# Allegro board HY_RTL8152_V10_210602.brd
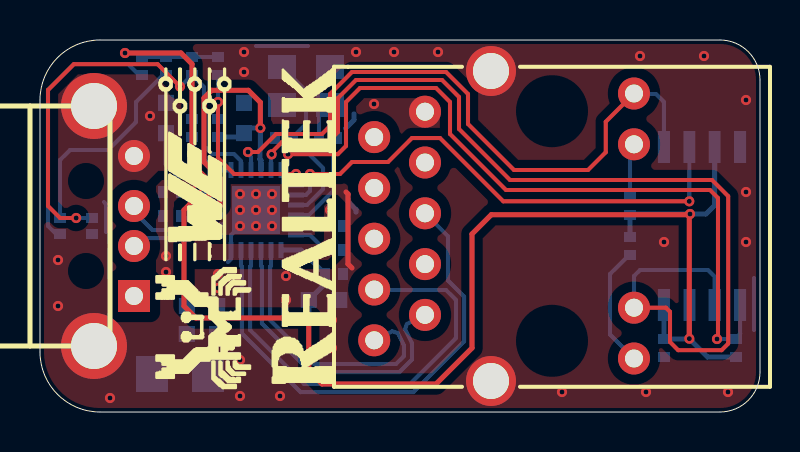
[diagram p0: board, top side]
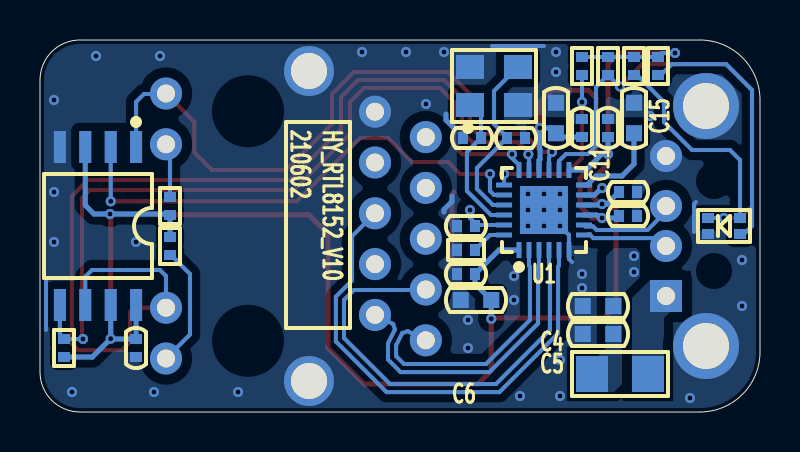
[diagram p1: board, bottom side, seen from below]

Outline 36 x 18.6 mm; copper layers: TOP, BOTTOM. Coordinates in mm from the lower left corner of the outline.
Outline path: 0,15.6 arc(0.88,17.72) 3,18.6 34,18.6 arc(35.41,18.01) 36,16.6 36,2 arc(35.41,0.59) 34,0 3,0 arc(0.88,0.88) 0,3 0,15.6

## Design rules (mm)
constraint set DEFAULT: min track width 0.203, pair gap 0.203
net group DP1: nets MDIN0 MDIP0
net group DP2: nets MDIN1 MDIP1
net group DP3: nets USBDM USBDP

## Placement (name value [footprint] x y rotation side)
C1  100nF_50V  [C0402]  31.2 3.2 90 bottom
C2  12pF_50V  [C0402]  14.4 13.7 180 bottom
C3  12pF_50V  [C0402]  12.2 13.7 0 bottom
C4  10uF_10V  [C0603]  8.1 5.3 180 bottom
C5  10uF_10V  [C0603]  8.1 3.9 180 bottom
C6  10uF_10V  [C0603]  14.2 5.6 180 bottom
C7  100nF_50V  [C0402]  7.6 14.2 270 bottom
C8  100nF_50V  [C0402]  14.7 6.9 180 bottom
C9  100nF_50V  [C0402]  6.6 11 0 bottom
C11  10uF_10V  [C0603]  10.2 14.7 270 bottom
C12  100nF_50V  [C0402]  6.6 9.8 0 bottom
C13  100nF_50V  [C0402]  8.9 14.2 270 bottom
C14  100nF_50V  [C0402]  14.7 9.3 180 bottom
C15  10uF_10V  [C0603]  6.3 14.7 270 bottom
D1  -  [XL-2012SURUGC]  1.8 9.3 180 bottom
F1  6V 2A  [FUSE1206]  7 1.9 0 bottom
J1  -  [7499111121A]  25.6 9.3 0 top
J2  -  [USB-A-MALE]  4.9 9.3 180 top
NOREF  -  []  0 0 90 top
NOREF#2  -  []  -0.21 0 0 top
NOREF#3  -  []  0 0 0 top
R1  2.49K  [R0402]  14.7 8.1 180 bottom
R2  4.7K  [R0402]  8.9 17.3 270 bottom
R3  4.7K  [R0402]  7.6 17.3 270 bottom
R4  510R  [R0402]  29.5 8.3 90 bottom
R5  510R  [R0402]  29.5 10.3 270 bottom
R6  4.7K  [R0402]  34.8 3.2 90 bottom
R7  4.7K  [R0402]  5.1 17.3 270 bottom
R8  4.7K  [R0402]  6.3 17.3 270 bottom
U1  RTL8152B-VB-CG  [QFN24-4X4X0R5-2R4X2R4]  10.8 10.1 180 bottom
U2  MX25L1606EM2I-12G/NI  [SOIC8_208]  33.1 9.3 0 bottom
X1  X322525MOB4SI  [X-4P-3R2X2R5-SMD]  13.3 16.3 180 bottom

## Library data of the parts
C1 = CAP NP_3
C2-C9 C11-C15 = CAP NP_2
D1 = XL-2012SURUGC
F1 = FUSE
J1 = 7499111121A
J2 = USB-A-MALE
R1-R8 = R_Generic
U1 = RTL8152B-VB-CG
U2 = CEIT_C5000_0
X1 = X322525MOB4SI

## Footprints (pads in the part's own frame, mm; a bottom-side part is the same pattern mirrored in y, then rotated)
7499111121A
  round 1.6 hole 0.9: 1(-8.89,-5.715) 2(-6.35,-4.445) 3(-8.89,-3.175) 4(-6.35,-1.905) 5(-8.89,-0.635) 6(-6.35,0.635) 7(-8.89,1.905) 8(-6.35,3.175) 9(-8.89,4.445) 10(-6.35,5.715) 11(4.1,-6.625) 12(4.1,-4.085) 13(4.1,4.085) 14(4.1,6.625)
  round 2.5 hole 1.8: 15(-3.05,-7.75) 16(-3.05,7.75)
C0402
  rect 0.5x0.6 smd: 1(-0.45,0) 2(0.45,0)
C0603
  rect 0.8x0.8 smd: 1(-0.762,0) 2(0.762,0)
FUSE1206
  rect 1.6x1.8 smd: 1(-1.4,0) 2(1.4,0)
QFN24-4X4X0R5-2R4X2R4
  rect 0.25x0.8 smd: 1(-1.25,-2) 2(-0.75,-2) 3(-0.25,-2) 4(0.25,-2) 5(0.75,-2) 6(1.25,-2) 13(1.25,2) 14(0.75,2) 15(0.25,2) 16(-0.25,2) 17(-0.75,2) 18(-1.25,2)
  rect 0.8x0.25 smd: 7(2,-1.25) 8(2,-0.75) 9(2,-0.25) 10(2,0.25) 11(2,0.75) 12(2,1.25) 19(-2,1.25) 20(-2,0.75) 21(-2,0.25) 22(-2,-0.25) 23(-2,-0.75) 24(-2,-1.25)
  rect 2.4x2.4 smd: 25(0,0)
R0402
  rect 0.5x0.6 smd: 1(-0.45,0) 2(0.45,0)
SOIC8_208
  rect 0.6x1.6 smd: 1(-1.905,-3.95) 2(-0.635,-3.95) 3(0.635,-3.95) 4(1.905,-3.95) 5(1.905,3.95) 6(0.635,3.95) 7(-0.635,3.95) 8(-1.905,3.95)
USB-A-MALE
  rect 1.6x1.6 hole 0.9: 1(0.2,3.5)
  round 1.6 hole 0.9: 2(0.2,1) 3(0.2,-1) 4(0.2,-3.5)
  round 3.3 hole 2.3: 5(2.2,6) 6(2.2,-6)
X-4P-3R2X2R5-SMD
  rect 1.4x1.2 smd: 1(-1.2,-0.95) 2(1.2,-0.95) 3(1.2,0.95) 4(-1.2,0.95)
XL-2012SURUGC
  rect 0.6x0.5 smd: 1(-0.8,0.4) 2(0.8,0.4) 3(-0.8,-0.4) 4(0.8,-0.4)

## Nets
GND: C1.1 C2.1 C3.1 C4.1 C5.1 C6.1 C7.1 C8.1 C9.1 C11.1 C12.1 C13.1 C14.1 C15.1 D1.3 J1.10 J1.15 J1.16 J2.4 J2.5 J2.6 R1.1 U1.6 U1.25 U2.4 X1.2 X1.4
VDD5: C4.2 C5.2 F1.2 U1.11(VDD5)
VDD10: C11.2 C12.2 C13.2 C14.2 U1.9 U1.16 U1.23
VDD10_UPS: C15.2 U1.12
VDD33: C1.2 C6.2 C7.2 C8.2 C9.2 R2.1 R3.1 R4.2 R5.2 R6.1 R7.1 R8.1 U1.1 U1.10 U1.13 U2.3(W\P\) U2.7 U2.8
GPIO: D1.1(R-) R3.2 U1.14
LANWAKEB: R2.2 U1.19
LED0_LINK/SPICSB: J1.14 U1.15 U2.1
LED1_SPEED/SPISCK: J1.12 U1.17 U2.6
MDIN0: J1.2 U1.3
MDIN1: J1.6 U1.5
MDIP0: J1.1 U1.2
MDIP1: J1.3 U1.4
SPISDI: R6.2 U1.18 U2.5
SPISDO: U1.20 U2.2
USBDM: J2.2 U1.7
USBDP: J2.3 U1.8
XI: C2.2 U1.22 X1.1
XO: C3.2 U1.21 X1.3(X2)
N16925406: F1.1 J2.1(VBUS)
N16930882: R1.2 U1.24
N16935674: D1.4 R7.2
N16935689: D1.2 R8.2
N16938451: J1.11 R4.1
N16938454: J1.13 R5.1

Pads without a net: J1 4 5 7 8 9

## Via types
v1: diameter 0.508, hole 0.254, TOP to BOTTOM, 59 vias

## Routing (per net, layer and track width the routed paths; a pad name or vN(x,y) marks a point on that pad's centre or on a via; arc(x,y) is an arc through that point)
GND: length 15.7
  TOP w0.254: 15.3,11 15.4,10.9 15.4,7.4 15.6,7.2
  BOTTOM w0.203: 9.4,7.5 9.55,7.65 U1.6 9.55,8.85 v1(10,9.3) v1(10.8,10.1) ; 35.7,4.1 35.7,6.7 ; 3.2,10.5 3.3,10.4 3.3,9 ; 13.4,18.3 10.8,18.3
  BOTTOM w0.254: 15.8,10 15.8,10.13 15.4,10.53 15.4,10.8 ; 15.28,14.18 15.7,14.6 15.7,14.9
  vias: v1(0.9,7.6) v1(0.9,5.3) v1(3.5,0.7) v1(5.5,14.8) v1(8.9,6.9) v1(8.9,6.2) v1(10,10.9) v1(10,10.1) v1(10,2.6) v1(10,0.8) v1(10.2,18) v1(10.2,17) v1(10.8,10.9) v1(10.8,9.3) v1(11.6,10.9) v1(11.6,10.1) v1(11.6,9.3) v1(12,0.8) v1(12.3,6.8) v1(12.3,5.6) v1(14.6,4.6) v1(14.6,3.2) v1(15.8,18) v1(16.7,15.4) v1(17.7,18) v1(19.9,18) v1(26.1,1) v1(30,17.8) v1(30.3,1) v1(31.2,8.5) v1(33.2,17.8) v1(34.4,1) v1(35.3,15.6) v1(35.3,11) v1(35.3,8.5)
VDD5: length 1.1
  BOTTOM w0.254: U1.11 8.28,10.85 7.93,11.2 v1(7.89,11.2)
  vias: v1(6.3,7.8) v1(6.3,7)
VDD10: length 20.3
  TOP w0.254: v1(7.9,9.7) 8.4,9.7 9,10.3 9,11.7 8.2,12.5 8.2,15.7 8.58,16.08 10.42,16.08 11.02,15.48 v1(11.02,14.2)
  BOTTOM w0.203: v1(14.5,10.1) 14.5,9.7 14.25,9.45 C14.2 14.2,9.35 U1.23
  BOTTOM w0.254: C12.2 7.15,9.7 v1(7.9,9.7) 8.02,9.82 8.14,9.82 8.18,9.85 U1.9 ; C13.2 10.01,13.75 C11.2 10.46,14.2 v1(11.02,14.2) 11.02,13.14 11,13.12 11,12.64 11.05,12.59 U1.16
VDD10_UPS: length 4.5
  BOTTOM w0.254: C15.2 6.3,12.4 6.9,11.8 8.2,11.8 8.65,11.35 U1.12
VDD33: length 89.4
  TOP w0.254: 32.47,9.87 22.57,9.87 21.6,8.9 21.6,3.2 19.8,1.4 14.1,1.4 13.44,2.06 v1(13.44,4.66) 13.4,4.7 7.8,4.7 7.2,5.3 7.2,10.1 7.5,10.4 v1(7.9,10.4) 8,10.4 8.5,10.9 8.5,11.5 7.6,12.4 v1(7.6,12.9) 7.6,17.4 7.05,17.95 v1(4.25,17.95) ; 32.47,9.87 v1(32.5,9.9) ; 32.47,9.87 v1(32.47,3.67)
  BOTTOM w0.203: R2.1 R3.1 R8.1 R7.1 4.9,17.95 v1(4.25,17.95)
  BOTTOM w0.254: v1(32.47,3.67) 32.45,3.65 C1.2 31.2,3.65 U2.8 ; v1(32.47,3.67) 33.38,2.75 R6.1 ; v1(32.47,3.67) U2.7 ; U1.10 7.95,10.35 v1(7.9,10.4) 7.65,10.4 C9.2 ; C7.2 v1(7.6,12.9) 7.9,12.9 8.7,12.1 U1.13 ; v1(13.44,4.66) C6.2 14.25,6.41 C8.2 13.05,8.1 U1.1 ; U2.3 33.73,10.34 33.3,9.9 v1(32.5,9.9) 29.55,9.9 R5.2 R4.2
GPIO: length 23.1
  TOP w0.203: v1(1.81,9.7) 1,9.7 0.4,10.3 0.4,16.1 1.69,17.39 5.88,17.39 v1(7,16.27)
  BOTTOM w0.203: U1.14 10.05,12.55 9.7,12.9 8.6,12.9 8.2,13.3 8.2,16.25 R3.2 7.02,16.27 v1(7,16.27) ; D1.1 v1(1.81,9.7)
LANWAKEB: length 8.9
  TOP w0.203: v1(8.9,15.5) 8.9,12.7 9.7,11.9 v1(12.8,11.9)
  BOTTOM w0.203: R2.2 v1(8.9,15.5) ; U1.19 v1(12.8,11.9)
LED0_LINK/SPICSB: length 32.2
  TOP w0.203: v1(10.4,13) 10.9,13 11.8,13.9 14.1,13.9 14.5,14.3 14.5,15.9 15.6,17 20.3,17 21.4,15.9 21.4,14.4 23.7,12.1 27.4,12.1 28.29,12.99 28.29,14.51 J1.14
  BOTTOM w0.203: U2.1 31.2,15.51 30.8,15.9 29.72,15.9 J1.14 ; v1(10.4,13) 10.4,12.9 10.55,12.75 U1.15
LED1_SPEED/SPISCK: length 50.8
  TOP w0.203: v1(11.58,12.88) 11.58,12.98 12.1,13.5 14.4,13.5 14.9,14 14.9,15.7 15.8,16.6 20.1,16.6 20.95,15.75 20.95,14.15 23.5,11.6 33.6,11.6 34.41,10.79 34.41,3.42 34.08,3.09 31.91,3.09 31.5,3.5 31.5,5.01 31.3,5.22 J1.12
  BOTTOM w0.203: v1(11.58,12.88) 11.58,12.73 11.55,12.7 U1.17 ; U2.6 33.73,6.76 33.4,7.1 30,7.1 29.7,6.8 J1.12
MDIN0: length 15.4
  BOTTOM w0.203: U1.3 11.05,7.32 11.1,7.27 11.1,4.43 13.53,1.99 17.97,1.99 18.6,2.63 18.6,3.43 18.25,4.13 18.34,4.4 J1.2
MDIN1: length 24.8
  BOTTOM w0.203: U1.5 10.05,7.32 10.1,7.27 10.1,3.93 13.03,0.99 18.67,0.99 21.21,3.53 21.21,5.77 20.4,6.57 20.4,8.78 J1.6
MDIP0: length 13.8
  BOTTOM w0.203: J1.1 17.62,4.04 17.89,3.95 18.19,3.34 18.19,2.79 17.8,2.4 13.7,2.4 11.5,4.6 11.5,7.27 11.55,7.32 U1.2
MDIP1: length 22.6
  BOTTOM w0.203: U1.4 10.55,7.32 10.5,7.27 10.5,4.1 13.2,1.4 18.5,1.4 20.8,3.7 20.8,5.6 20.3,6.1 16.73,6.1 J1.3
SPISDI: length 38.1
  TOP w0.203: v1(12.4,12.89) 14.89,12.89 15.3,13.3 15.3,15.5 16,16.2 19.8,16.2 20.5,15.5 20.5,13.9 23.3,11.1 33.5,11.1 33.9,10.7 33.9,3.7 v1(33.85,3.65)
  BOTTOM w0.203: U2.5 35.01,3.9 34.75,3.65 ; v1(12.4,12.89) 12.4,12.7 12.05,12.35 U1.18 ; R6.2 34.75,3.65 ; 34.75,3.65 v1(33.85,3.65)
SPISDO: length 25.4
  TOP w0.203: v1(32.46,10.53) 23.16,10.53 20,13.7 18.6,13.7 17.4,12.5 15.6,12.5 15,11.9 v1(13.5,11.9)
  BOTTOM w0.203: v1(13.5,11.9) 13.5,11.05 13.3,10.85 U1.20 ; v1(32.46,10.53) 32.47,10.54 U2.2
USBDM: length 4.3
  BOTTOM w0.203: J2.2 5.09,8.69 8.33,8.69 8.51,8.87 8.63,8.87 8.65,8.85 U1.7
USBDP: length 4.9
  BOTTOM w0.203: U1.8 8.72,9.28 8.34,9.28 8.17,9.1 5.62,9.1 4.7,10.02 J2.3
XI: length 7.2
  BOTTOM w0.203: U1.22 13.45,9.85 14.65,11.05 14.65,12.99 14.35,13.29 14.35,13.3 C2.2 13.95,14.8 X1.1
XO: length 9.2
  BOTTOM w0.203: X1.3 13.3,16.05 13.3,14.4 12.65,13.75 C3.2 14.15,12.2 14.15,11.15 13.35,10.35 U1.21
N16930882: length 1.8
  BOTTOM w0.203: U1.24 13.5,8.85 R1.2
N16935674: length 13
  BOTTOM w0.203: R7.2 4.95,16.85 4.41,17.39 1.69,17.39 0.4,16.1 0.4,9.3 0.8,8.9 D1.4
N16935689: length 10.5
  BOTTOM w0.203: R8.2 6.15,16.85 4.8,15.5 4.8,14.5 3.4,13.1 1.5,13.1 1,12.6 D1.2
N16938451: length 6.1
  BOTTOM w0.203: R4.1 29.45,7.85 28.5,6.9 28.5,3.88 J1.11
N16938454: length 2.7
  BOTTOM w0.203: 29.7,13.38 29.5,13.19 R5.1

## Copper pours and planes (outline as drawn; the poured copper is in the pictures)
GND on TOP: 0.2,15.6 1.02,17.58 3,18.4 34,18.4 35.27,17.87 35.8,16.6 35.8,2 35.27,0.73 34,0.2 3,0.2 1.02,1.02 0.2,3 ; 4 cut-outs
GND on BOTTOM: 0.2,15.6 1.02,17.58 3,18.4 34,18.4 35.27,17.87 35.8,16.6 35.8,2 35.27,0.73 34,0.2 3,0.2 1.02,1.02 0.2,3 ; 4 cut-outs
VDD5 on TOP: 8,11.6 6.1,11.6 5.8,11.3 5.8,6.7 6.1,6.4 6.6,6.4 6.7,6.5 6.7,10.5 7.1,10.9 8,10.9 8.2,11.1 8.2,11.4
VDD5 on BOTTOM: 9.2,1 7.3,1 6.9,1.4 6.9,5.8 6,6.7 6,8 6.2,8.2 7.3,8.2 7.7,7.8 7.7,3.2 8.1,2.8 9.2,2.8
VDD10 on TOP: 8.2,9.9 7.7,9.9 7.6,9.8 7.6,7.8 7.8,7.6 14.4,7.6 14.8,8 14.8,10.3 14.7,10.4 14.3,10.4 14.2,10.3 14.2,8.6 14,8.4 8.6,8.4 8.4,8.6 8.4,9.7
N16925406 on BOTTOM: 6.4,1 6.4,5.7 5.5,6.6 3.9,6.6 3.9,5 4.5,5 4.8,4.7 4.8,1

## Text on the board
Ref Des/Silkscreen Bottom: HY_RTL8152_V10 | 210602
DISPLAY_BOTTOM: SCALE: NONE | If the angle of PCB board outline is circular,please use this kind of break out area | If not use it,please delete it before you gerber out | If the angle of PCB board outline is right angle,please use this kind of break out area | AS usual,please use the 0.8MM stamp Via | A_TARGET:1.53 mm | ___ PUBI (PUBLIC INFORMATION) | ___ FIUO (HY INTERNAL USE ONLY) | ___ FCP (HY CONFIDENTIAL PROPRIETARY) | THIS DOCUMENT CONTAINS INFORMATION | PROPRIETARY TO FREESCALE AND SHALL | NOT BE USED FOR ENGINEERING DESIGN | PROCUREMENT OR MANUFACTURE IN WHOLE | OR IN PART WITHOUT THE CONSENT OF | NXP. | 1. THIS DRAWING SPECIFIES THE REQUIREMENTS FOR A | 2. THE PWB MUST BE LEAD FREE ASSEMBLY PROCESS COMPATIBLE AND MUST BE ABLE TO HANDLE | 3. BASE MATERIAL - LAMINATE AND PREPREG SHALL MEET IPC-4101B-26, 83 or 98 | Tg - MUST BE GREATER THAN OR EQUAL TO 150 DEGREES CELSIUS. | Td - MUST BE GREATER THAN OR EQUAL TO 330 DEGREES CELSIUS. | 4. COPPER FOIL WEIGHT - SEE STACKUP DETAIL 'A' | 5. CHARACTERISTIC IMPEDANCE - SEE DETAIL 'B' | 6. MINIMUM CONDUCTIVE WIDTH/SPACING TO BE .00X"/.00X" | 7. PLATING FINISH - BOTH SIDES ENIG (ELECTROLESS NICKEL IMMERSION GOLD): | 8. ALL THROUGH HOLE VIAS MAY BE PLATED SHUT. | - MUST BE UL RECOGNIZED AND MUST HAVE AN ID THAT CONFORMS TO UL94V-0 | 9. SOLDERMASK - GREEN COLOR (TAIYO OR EQUIVALENT), BOTH SIDES. | 10. SILKSCREEN - WHITE EPOXY INK, BOTH SIDES.  NO SILK ON PADS. | 11. ELECTRICAL TEST - 100% IPCD356. | 12. PRINTED WIRING BOARD IS TO BE INDIVIDUALLY BAGGED. | 13. DRC'S MUST BE RUN ON THE GERBER BEFORE BUILDING BOARDS, | UNLESS PRIOR APPROVAL IS GIVEN IN WRITING BY FREESCALE. | 14. ADD TEARDROPS TO ALL SIGNAL LAYERS. | 15. SOLDER SAMPLES TO BE PROVIDED. | 16. BASIC GRID INCREMENT AT 1:1 IS .0001. | 17. SUPPLIER MARKINGS - ON SOLDER SIDE ONLY, WHERE SHOWN. | MODIFICATION OF SOLDERMASK IS NOT ALLOWED WITHOUT WRITTEN PERMISSION FROM FREESCALE. | WITH SPECIFICATION IPC-A-600 CLASS 2 (LATEST REVISION). | A MINIMUM OF 5 CYCLES AT 260 DEGREES CELSIUS FOR 10 SECONDS. | 18. THE PWB WILL BE MARKED AS LEAD FREE BY USE OF AN INK STAMP Pb | 19. THE PWB WILL BE MARKED AS LEAD FREE PROCESS COMPATIBLE BY USE OF AN INK STAMP 260 C | 21. FINISHED PCB MUST BE PANELIZED FOR ASSEMBLY ACCORDING TO CONTRACT MANUFACTURING REQUIREMENT. | ADDITION OF .25" RAILS AND .125" NON-PLATED TOOLING HOLES ARE AT THE DISCRETION | OF CONTRACT MANUFACTURER AND FAB HOUSE. | PANELIZATION MUST BE APPROVED BY FREESCALE. | 2.540-6.350 MICRON (100-250 MICROINCH) OF NICKEL. | .05080-.232 MICRON (2-8 MICROINCH) OF GOLD OVER | PRINTED WIRING BOARD IN ACCORDANCE | NO.2, XinYe Road, West High-Tech Zone, ChengDu, Sichuan | 20. ALL PLATED AND NON-PLATED THROUGH HOLES ARE TO BE DRILLED AT PRIMARY DRILL STEP. | ALL HOLE LOCATION TOLERANCES ARE TO BE +/-.002 IN REFERENCE TO THE PRIMARY DATUM. | X | XXXLZJXXX | V10A | 18-10-01 | JLC:  1.6mm THK +/- 10% | LAYER 1  TOP SIDE          1oz+plating | LAYER 2  BOTTOM SIDE       1oz+plating | FINISHED Cu WEIGHT | NO-***** | 1/1 | CAD-***** | 1 | DETAIL A | LAYER STACKUP | DETAIL B | IMPEDANCE REQUIREMENTS | IMPEDANCE TOLERANCE IS 10% | LAN9500_TEST_V10A | FAB-***** | A2 | HYOC
DEVICE_TYPE_BOTTOM: FIGURE | FINISHED_SIZE | 0.254 | 0.9 | 1.8 | 2.3 | DRILL CHART: TOP to BOTTOM | ALL UNITS ARE IN MILLIMETERS | PLATED | QTY | 59 | 18 | 2 | 81 | TOTAL HOLES:
